# Altium PCB pcb.PcbDoc
Units mil, origin at the board's own origin, x right, y up, seen from the top; angles counter-clockwise.
Board outline 2605 x 2785 mil, 2 copper layers (Top Layer, Bottom Layer); 17 components, 12 nets, 80 pads, 2 vias.
Unrouted connection lines stored in the file: 1.
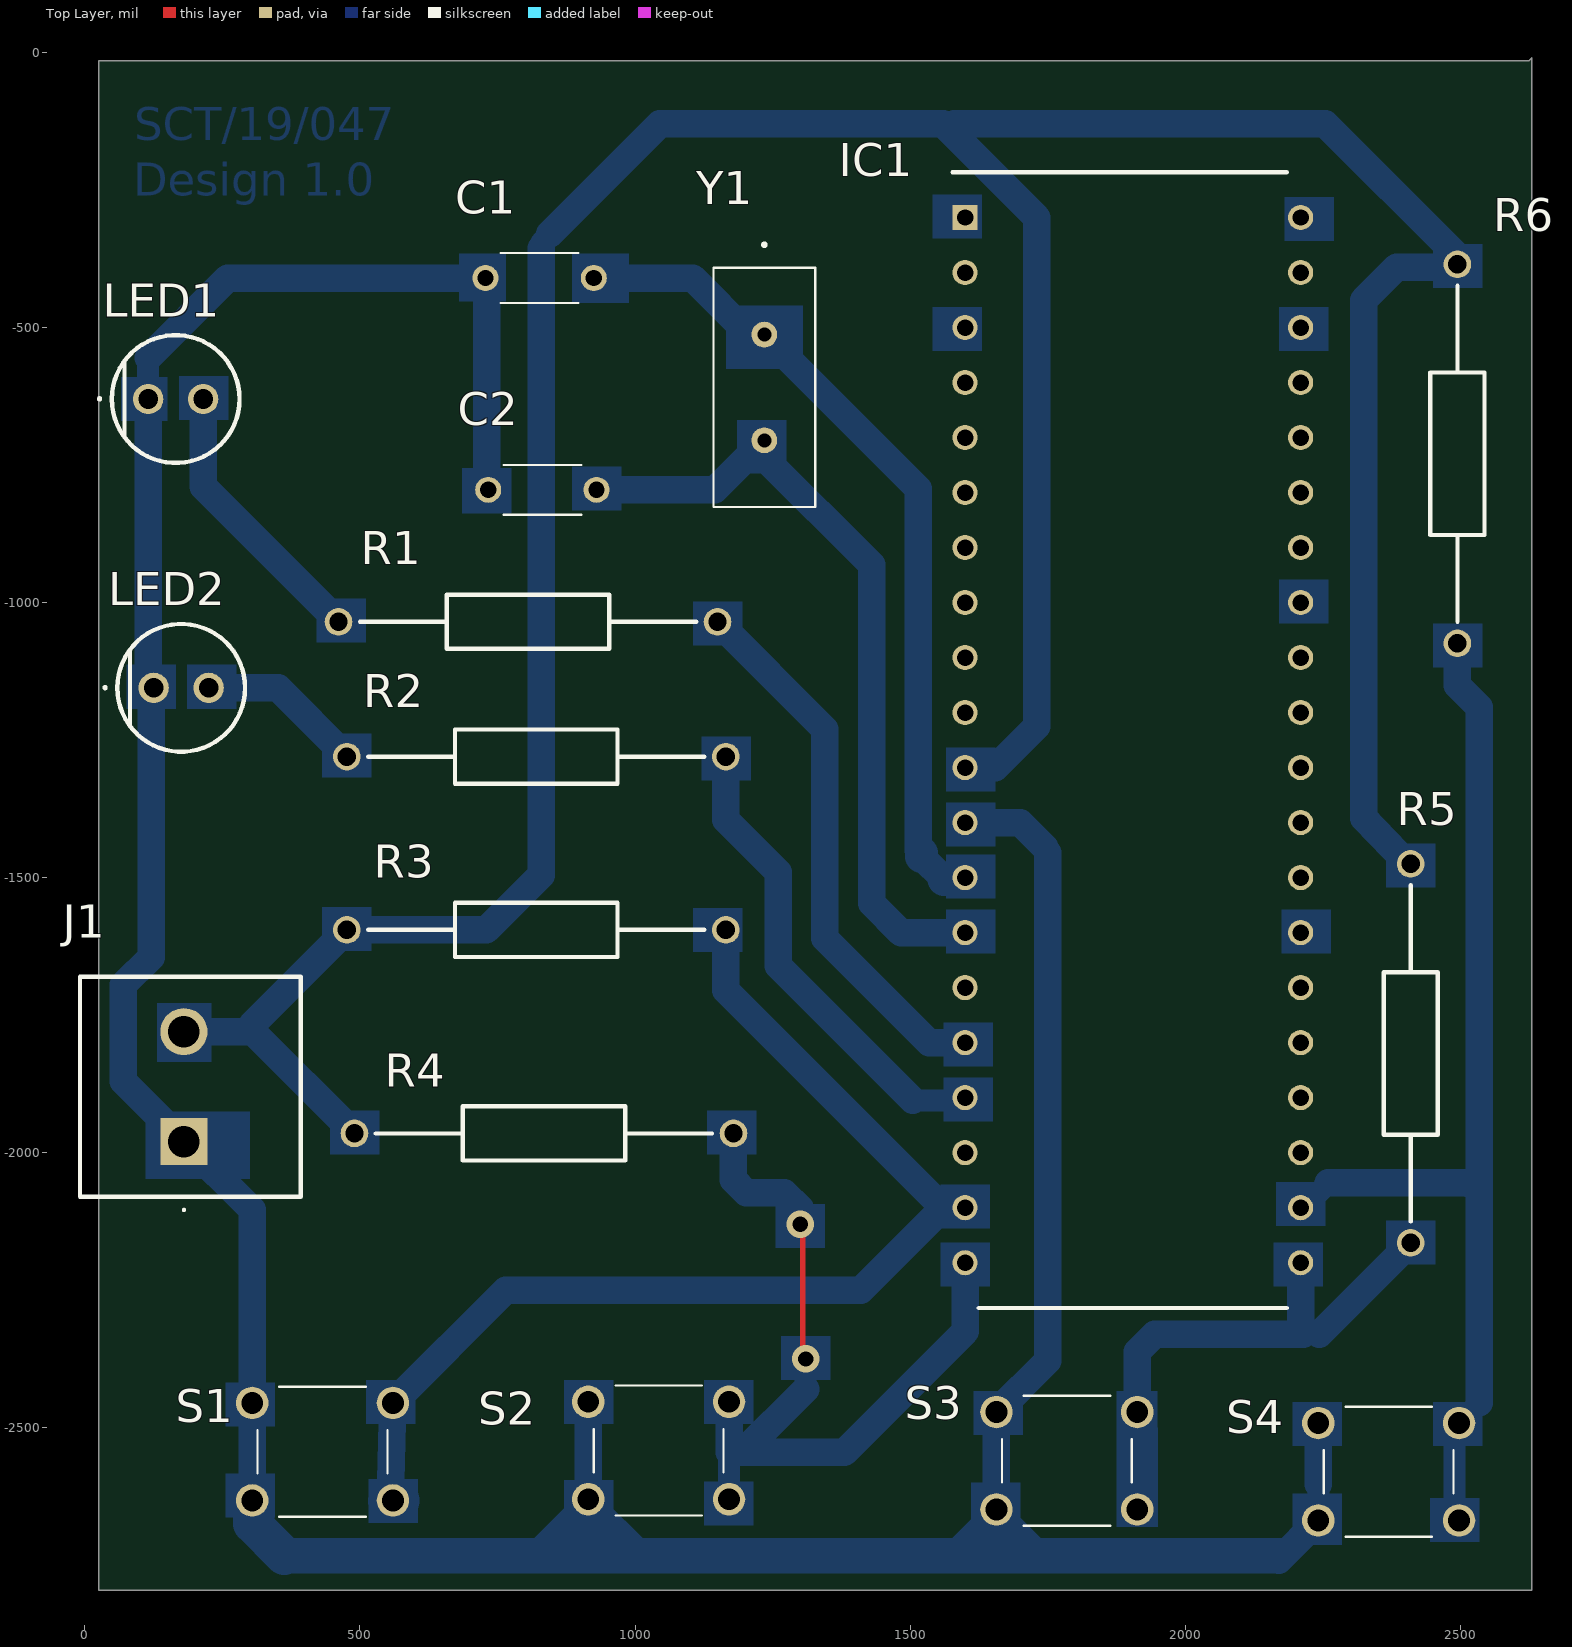
[diagram p0: Top Layer view]
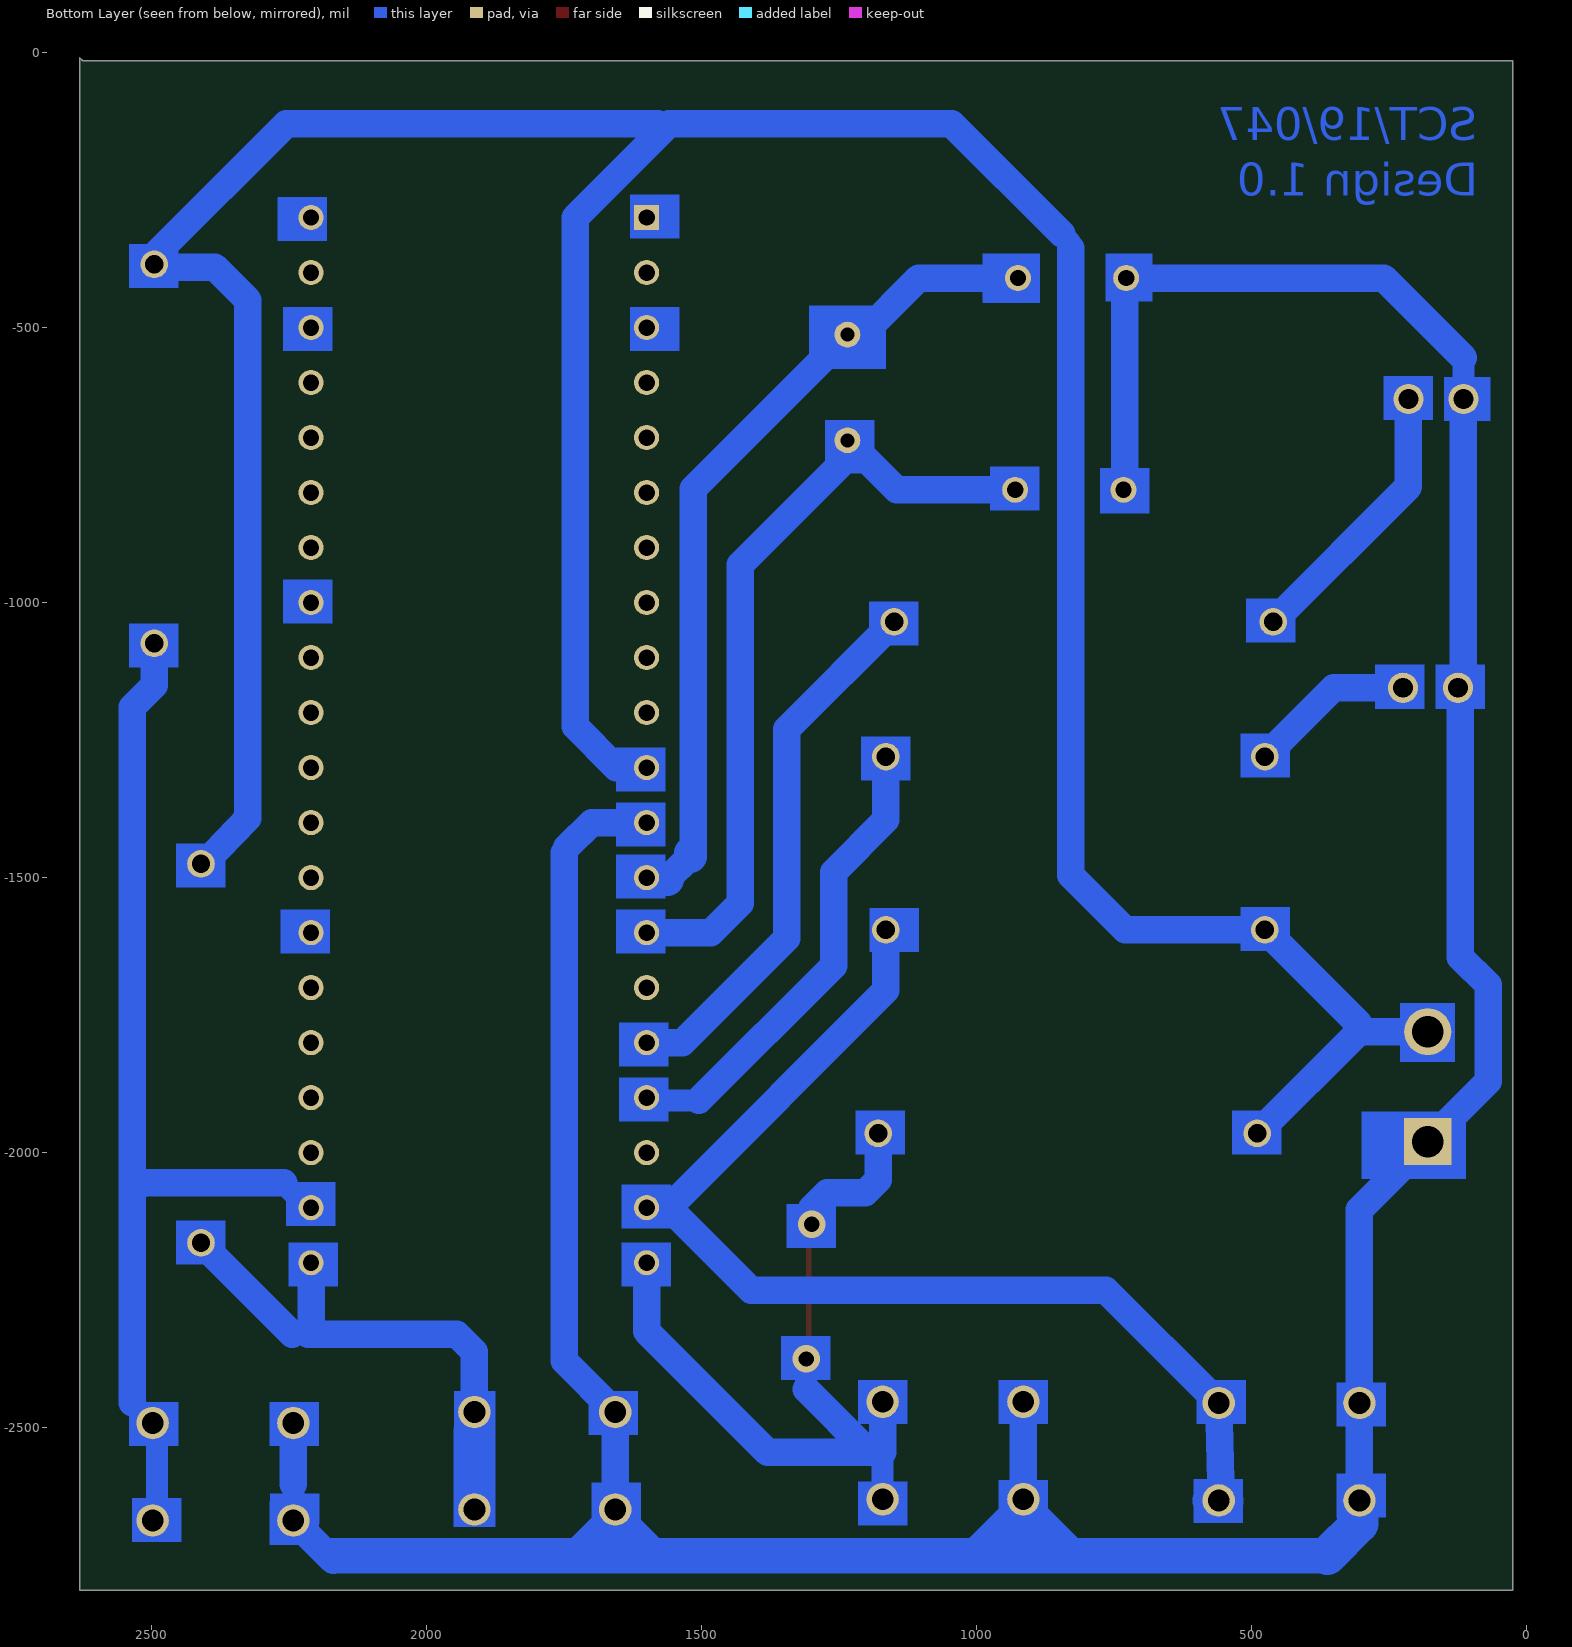
[diagram p1: Bottom Layer view, seen from below]
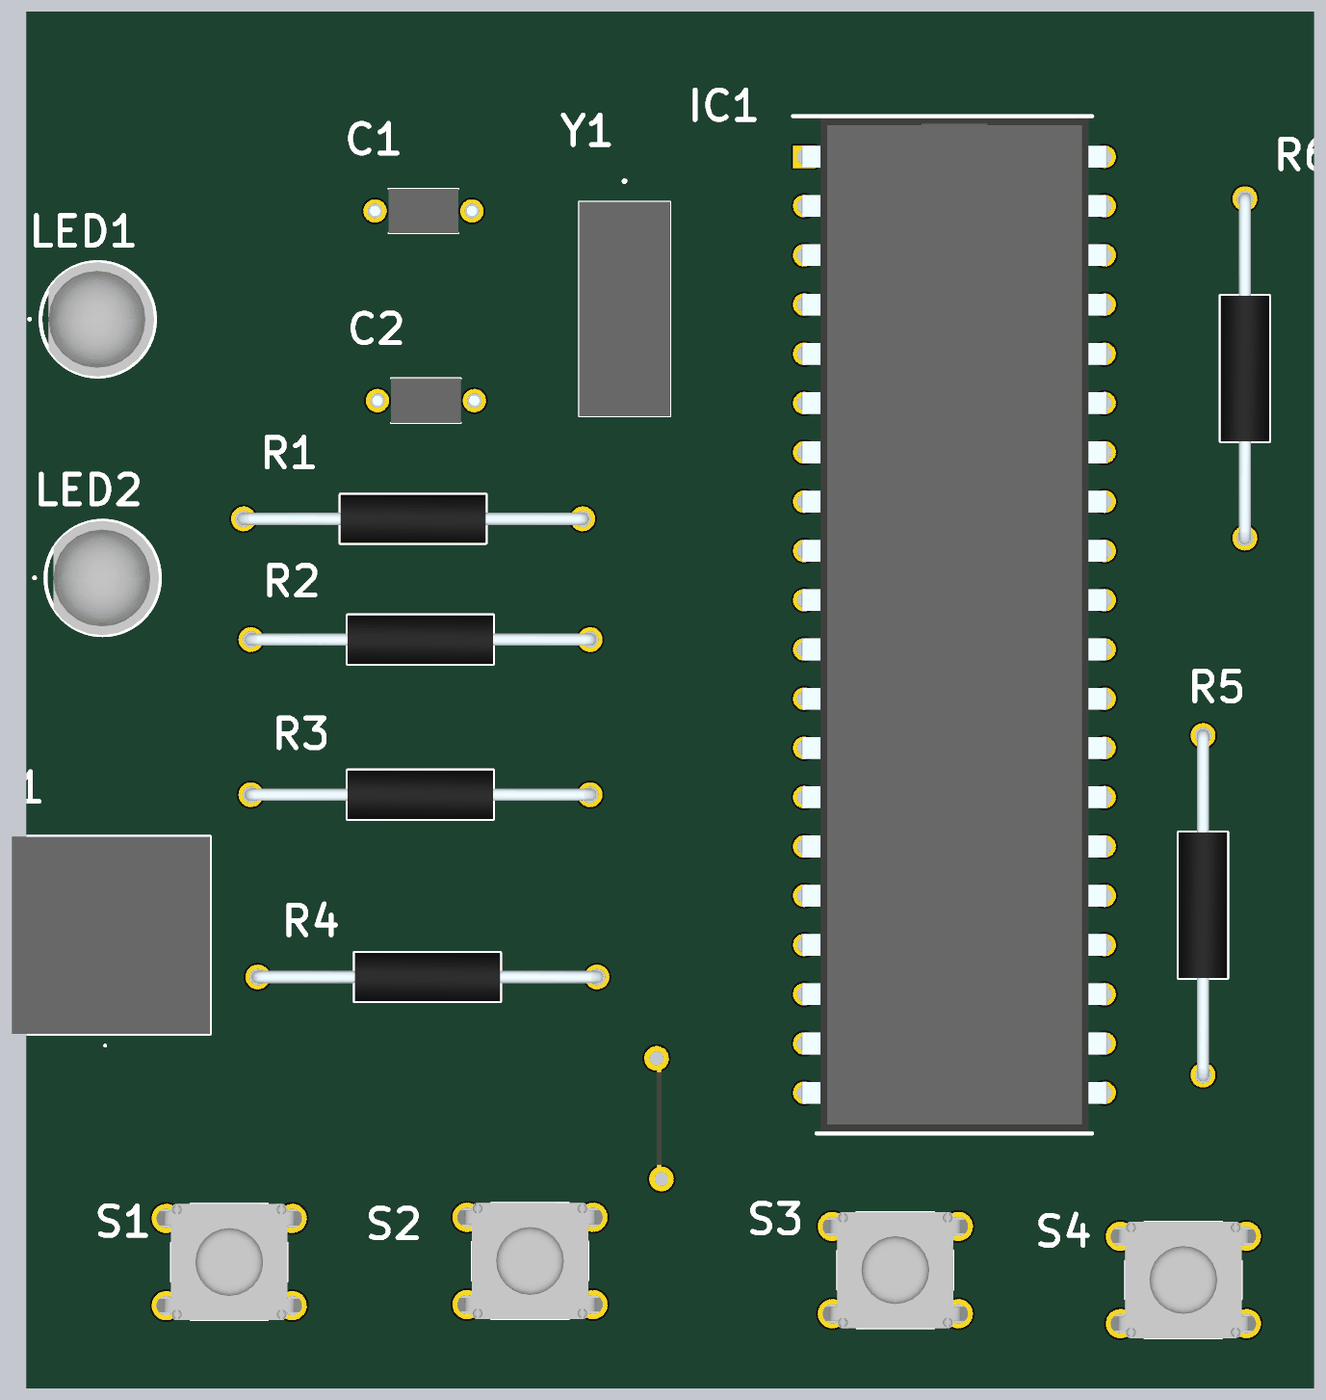
[diagram p2: 3D render of the assembled board from above, using the file's embedded part models]

## Layer stack, top to bottom
Top Solder: solder mask 0.4, Solder Resist, Dk 3.5
Top Layer: signal copper 1.4
Dielectric 1: dielectric 12.6, FR-4, Dk 4.8
Bottom Layer: signal copper 1.4
Bottom Solder: solder mask 0.4, Solder Resist, Dk 3.5

## Board outline
25,-2795 2630,-2795 2630,-10 2625,-15 25,-15

## Design rules (kind name [scope] priority, off if disabled: settings)
Clearance [All] p1: gap=10 ignorepadtopadclearanceinfootprint=FALSE except(0: Arc-Hole Track-Hole SMDPad-Hole THPad-Hole Via-Hole Fill-Hole Poly-Hole Region-Hole Text-Hole)
PolygonConnect [All] p1: connectstyle=Relief reliefconductorwidth=10 reliefentries=4 polygonreliefangle="90 Angle" airgapwidth=10
RoutingLayers [All] p1: top layer_v5=FALSE bottom layer_v5=TRUE
RoutingVias [All] p1: holewidth=28 width=50 viastyle="Through Hole" minholewidth=28 minwidth=50 maxholewidth=28 maxwidth=50
SolderMaskExpansion [All] p1: expansion=4 istentingtop=FALSE
Width Width_1 [All] p1: maxlimit=10 minlimit=10 preferedwidth=10
Width [All] p2: maxlimit=10 minlimit=10 preferedwidth=10
29 further rules are at their usual default settings.

## Classes and differential pairs
component class pic: C1 C2 IC1 LED1 LED2 R1 R3 R4 R5 R6 S2 S3 S4 Y1

## Components (designator, comment, footprint, x,y, rotation, side; value= is the part's Value field where it differs from the comment)
C1 "K220J10C0GF5UH5" K220J10C0GF5UH5 925,-410 r180 top
C2 "K220J10C0GF5UH5" K220J10C0GF5UH5 733.15,-795 r0 top
IC1 "PIC16F877A-I_P" DIP1550W56P254L5219H483Q40N 1905,-1250 r0 top
J1 "MC000048" MC000048 180,-1980 r90 top
LED1 "SSL-LX5093TC" SSL-LX5093SGC/B 165,-630 r180 top
LED2 "SSL-LX5093TC" SSL-LX5093SGC/B 175,-1155 r180 top
R1 "SFR25H0001002FR500" RESAD1750W63L750D250 461.02,-1035 r0 top
R2 "SFR25H0001002FR500" RESAD1750W63L750D250 476.02,-1280 r0 top
R3 "SFR25H0001002FR500" RESAD1750W63L750D250 1165,-1595 r180 top
R4 "SFR25H0001002FR500" RESAD1750W63L750D250 1178.98,-1965 r180 top
R5 "SFR25H0001002FR500" RESAD1750W63L750D250 2410,-2163.98 r90 top
R6 "SFR25H0001002FR500" RESAD1750W63L750D250 2495,-1073.98 r90 top
S1 "TL1105CF160Q" TL1105CF160Q 432.05,-2543.58 r0 top
S2 "TL1105CF160Q" TL1105CF160Q 1042.95,-2541.42 r0 top
S3 "TL1105CF160Q" TL1105CF160Q 1785,-2560 r0 top
S4 "TL1105CF160Q" TL1105CF160Q 2370,-2580 r0 top
Y1 "LFXTAL057135Bulk" LFXTAL057135Bulk 1235,-512.87 r270 top

## Footprints (in the part's own frame and the unit in brackets; to place one, negate y for a bottom-side part, rotate by r counter-clockwise, add the part's x,y. Pads: shape width x height; smd on the part's side, far side on the other; paste and mask are expansions set on the pad)
DIP1550W56P254L5219H483Q40N [mm]
  rect 1.16x1.16 hole 0.76: 1(-7.748,24.13)
  round 1.16 hole 0.76: 2(-7.748,21.59) 3(-7.748,19.05) 4(-7.748,16.51) 5(-7.748,13.97) 6(-7.748,11.43) 7(-7.748,8.89) 8(-7.748,6.35) 9(-7.748,3.81) 10(-7.748,1.27) 11(-7.748,-1.27) 12(-7.748,-3.81) 13(-7.748,-6.35) 14(-7.748,-8.89) 15(-7.748,-11.43) 16(-7.748,-13.97) 17(-7.748,-16.51) 18(-7.748,-19.05) 19(-7.748,-21.59) 20(-7.748,-24.13) 21(7.748,-24.13) 22(7.748,-21.59) 23(7.748,-19.05) 24(7.748,-16.51) 25(7.748,-13.97) 26(7.748,-11.43) 27(7.748,-8.89) 28(7.748,-6.35) 29(7.748,-3.81) 30(7.748,-1.27) 31(7.748,1.27) 32(7.748,3.81) 33(7.748,6.35) 34(7.748,8.89) 35(7.748,11.43) 36(7.748,13.97) 37(7.748,16.51) 38(7.748,19.05) 39(7.748,21.59) 40(7.748,24.13)
  silkscreen extent -8.33,-26.22 7.11,26.22, body extent -7.89,-26.1 7.89,26.1, height 4.83
K220J10C0GF5UH5 [mm]
  round 1.2 hole 0.75: 1(0,0) 2(5,0)
  silkscreen extent 0.7,-1.15 4.3,1.15, body extent -0.28,-1.15 5.28,1.15, height 6.3
LFXTAL057135Bulk [mm]
  round 1.192 hole 0.65: 1(0,0) 2(4.88,0)
  silkscreen extent -4.2,-2.35 7.96,2.35, body extent -3.09,-2.35 7.97,2.35, height 4.2
MC000048 [mm]
  rect 2.175x2.175 hole 1.45: 1(0,0)
  round 2.175 hole 1.45: 2(5.08,0)
  silkscreen extent -3.2,-5.4 7.62,4.8, body extent -2.54,-5.4 7.62,4.8, height 14.4
RESAD1750W63L750D250 [mm]
  round 1.275 hole 0.85: 1(0,0) 2(17.5,0)
  silkscreen extent 0.99,-1.25 16.51,1.25, body extent -0.32,-1.24 17.82,1.24, height 2.5
SSL-LX5093SGC/B [mm]
  round 1.4 hole 0.91: 1(1.27,0) 2(-1.27,0)
  silkscreen extent -2.95,-2.95 3.54,2.95, body extent -2.91,-2.94 2.54,2.94, height 9.57
TL1105CF160Q [mm]
  round 1.5 hole 1: 1(-3.25,-2.25) 2(3.25,-2.25) 3(3.25,2.25) 4(-3.25,2.25)
  silkscreen extent -3,-3 3,3, body extent -3.95,-3 3.95,3, height 5.11

## Part data
C1 C2: "Capacitor", Manufacturer_Name=Vishay, Mouser Part Number=594-K220J10C0GF5UH5, Arrow Part Number=K220J10C0GF5UH5, Arrow Price/Stock=https://www.arrow.com/en/products/k220j10c0gf5uh5/vishay, Datasheet Link=https://componentsearchengine.com/Datasheets/1/K220J10C0GF5UH5.pdf, Height=6.2mm, Manufacturer_Part_Number=K220J10C0GF5UH5, Mouser Price/Stock=https://www.mouser.co.uk/ProductDetail/Vishay-BC-Components/K220J10C0GF5UH5?qs=urQb6HxmPnJQavwMwFUEEw%3D%3D
IC1: "Integrated Circuit", Arrow Part Number=PIC16F877A-I/P, Manufacturer_Name=Microchip, Mouser Part Number=579-PIC16F877A-I/P, Arrow Price/Stock=https://www.arrow.com/en/products/pic16f877a-ip/microchip-technology?region=nac, Datasheet Link=http://componentsearchengine.com/Datasheets/1/PIC16F877A-I_P.pdf, Height=4.83mm, Manufacturer_Part_Number=PIC16F877A-I/P, Mouser Price/Stock=https://www.mouser.co.uk/ProductDetail/Microchip-Technology-Atmel/PIC16F877A-I-P?qs=Vn0zuzr35GH%252Bfm6E5Siyuw%3D%3D
J1: "Connector", Manufacturer_Name=MULTICOMP, Datasheet Link=http://www.farnell.com/datasheets/3186341.pdf, Height=14.3mm, Manufacturer_Part_Number=MC000048
LED1 LED2: "LED", Manufacturer_Name=Lumex, Mouser Part Number=696-SSL-LX5093TC, Arrow Part Number=SSL-LX5093TC, Arrow Price/Stock=https://www.arrow.com/en/products/ssl-lx5093tc/lumex?region=nac, Datasheet Link=https://datasheet.datasheetarchive.com/originals/distributors/Datasheets-DGA13/1155111.pdf, Manufacturer_Part_Number=SSL-LX5093TC, Mouser Price/Stock=https://www.mouser.co.uk/ProductDetail/Lumex/SSL-LX5093TC?qs=94qWIstW55WGdi06hcoEWQ%3D%3D
R1 R2 R3 R4 R5 R6: "Resistor", Manufacturer_Name=Vishay, Mouser Part Number=594-5053HD10K00F, Arrow Part Number=SFR25H0001002FR500, Arrow Price/Stock=https://www.arrow.com/en/products/sfr25h0001002fr500/vishay?region=nac, Datasheet Link=https://www.arrow.com/en/products/sfr25h0001002fr500/vishay, Manufacturer_Part_Number=SFR25H0001002FR500, Mouser Price/Stock=https://www.mouser.co.uk/ProductDetail/Vishay-BC-Components/SFR25H0001002FR500?qs=LCMWAU1DZcweHnnyAMZ4Zg%3D%3D
S1 S2 S3 S4: "Switch", Manufacturer_Name=E-Switch, Mouser Part Number=612-TL1105C, Datasheet Link=https://componentsearchengine.com/Datasheets/1/TL1105CF160Q.pdf, Height=8mm, Manufacturer_Part_Number=TL1105CF160Q, Mouser Price/Stock=https://www.mouser.co.uk/ProductDetail/E-Switch/TL1105CF160Q?qs=YXf4ACKMM4yAAz%252BbnhourA%3D%3D
Y1: "Crystal or Oscillator", Manufacturer_Name=IQD, Mouser Part Number=449-LFXTAL057135BULK, Datasheet Link=https://componentsearchengine.com/Datasheets/1/LFXTAL057135Bulk.pdf, Height=4.1mm, Manufacturer_Part_Number=LFXTAL057135Bulk, Mouser Price/Stock=https://www.mouser.co.uk/ProductDetail/IQD/LFXTAL057135Bulk?qs=e4%2FAndAAwgIkCKEhU7u90A%3D%3D

## Via types
v1: diameter 50, hole 28, Top Layer to Bottom Layer, 2 vias

## Nets (pads, with @x,y where several pads share a name; then routed paths per layer and width w, separated by ;. In a path a pad name is that pad's centre, name@x,y a point inside that pad or via, vN(x,y) a via of type N, cw(c..) or ccw(c..) an arc to the next point about the centre after c; other vN are vias at no path point)
GND: C1.2 C2.1 IC1.12 J1.1 LED1.1 LED2.1 S1.1 S1.4 S2.1 S2.4 S3.1 S3.4 S4.1 S4.4 | length 7619.1
  Bottom Layer w10: LED2.1@115,-1160 LED2.1@115,-1145 ; LED2.1@120,-1160 LED2.1@125,-1160 ; C2.1@730.65,-792.5 C2.1 ; 1750,-1455 1760,-1465
  Bottom Layer w40: LED2.1@115,-1140.91 122.11,-1148.02 LED2.1@120.06,-1150.06 ; LED1.1 115,-555 ; LED2.1@120.06,-1159.94 122.11,-1161.98 122.11,-1168.58 LED2.1@120.56,-1170.13 ; 362.5,-2732.5 1562.5,-2732.5 1570.63,-2740.63 2170,-2740.63 ; 815,-2730 S2.1 1020,-2735 ; 1570.63,-2735 S3.1 1753.47,-2745 ; S4.1 2242.05,-2602.5
  Bottom Layer w50: LED2.1@115,-1140.91 LED1.1 ; 115,-555 260,-410 C1.2 ; LED2.1@120.56,-1170.13 120.56,-1644.44 70,-1695 70,-1870 J1.1 304.1,-2104.1 S1.4 S1.1 ; C2.1@730.65,-792.5 C1.2@730.65,-410.65 ; S2.1 S2.4 ; IC1.12 1700,-1400 1745,-1445 ; S3.1 S3.4 1750,-2378.47 1750,-1455 ; 2170,-2740.63 S4.1 ; 2242.05,-2602.5 S4.4
  Bottom Layer w70: S1.1 304.1,-2674.1 362.5,-2732.5
NetC1_1: C1.1 IC1.13 Y1.1 | length 1440.6
  Bottom Layer w50: C1.1@933.81,-410 1105,-410 1207.87,-512.87 ; Y1.1 1515,-792.87 1515,-1450 ; 1520.58,-1461.64 1562.11,-1503.17
  Bottom Layer w60: 1520.58,-1461.64 1520.58,-1455.58 ; 1562.11,-1503.17 1568.17,-1503.17
NetC2_2: C2.2 IC1.14 Y1.2 | length 1416.1
  Bottom Layer w40: C2.2@925,-795 C2.2
  Bottom Layer w50: C2.2 1145,-795 Y1.2@1225,-715 ; 1235,-736.43 1430,-931.43 1430,-1546.43 1483.57,-1600 IC1.14
NetIC1_11: IC1.11 J1.2 R3.2 R4.2 R5.2 R6.2 | length 6608.2
  Bottom Layer w10: 839.58,-335.42 845.44,-329.56
  Bottom Layer w40: 305,-1780 305,-1766.02 ; 830,-356.06 830,-345 839.58,-335.42 ; IC1.11 1655,-1300 ; R6.2@2493.05,-368.05 2493.05,-383.05 R6.2
  Bottom Layer w50: J1.2 305,-1780 R4.2 ; 305,-1766.02 R3.2@475,-1596.02 ; R3.2 730,-1595 829.14,-1495.86 829.14,-356.06 ; 845.44,-329.56 1045,-130 1130,-130 ; 1135,-130 1560,-130 1730,-300 1730,-1225 1655,-1300 ; 1580,-130 2255,-130 R6.2@2493.05,-368.05 ; R5.2@2405,-1475 2325,-1391.92 2325,-450 2385,-390 R6.2@2495,-390
NetIC1_16: IC1.16 R1.2 | length 994.1
  Bottom Layer w50: R1.2@1146.67,-1031.67 1345,-1230 1345,-1610 1535,-1800 IC1.16
NetIC1_17: IC1.17 R2.2 | length 862.9
  Bottom Layer w40: 1505,-1905 1593.43,-1905 1598.43,-1900 IC1.17
  Bottom Layer w50: R2.2 1165,-1395 1260,-1490 1260,-1660 1505,-1905
NetIC1_19: IC1.19 R3.1 S1.2 S1.3 | length 2022.5
  Bottom Layer w40: S1.2@554.97,-2633.39 S1.2@555,-2632.16 ; S1.2@555,-2632.02 S1.2@555,-2632.16 ; S1.2@572.84,-2632.16 567.84,-2632.16 S1.2 S1.2@555,-2632.16 ; R3.1 1168.33,-1598.58 R3.1@1172.7,-1603.29
  Bottom Layer w50: S1.2@555,-2632.02 S1.3 765,-2250 1410,-2250 1560,-2100 ; R3.1 1165,-1705 1550,-2090
  Bottom Layer w80: S1.2@554.97,-2633.39 566.61,-2633.39 S1.2@567.84,-2632.16
NetIC1_20: IC1.20 R4.1 S2.2 S2.3 | length 1516.3
  Top Layer w10: v1(1300,-2130) 1305,-2135 1305,-2370 v1(1310,-2375)
  Bottom Layer w40: S2.2 1170.91,-2545 1195,-2545 ; S2.3@1170.91,-2457.83 S2.3@1170.91,-2455 ; v1@1298.09,-2128.09 v1(1300,-2130) ; 1310,-2430 v1(1310,-2375)
  Bottom Layer w50: 1170.91,-2545 S2.3@1170.91,-2457.83 ; R4.1 1178.98,-2049.07 1202.41,-2072.5 1271.57,-2072.5 1300,-2100.93 ; 1310,-2430 1195,-2545 1380,-2545 1599.96,-2325.04 IC1.20
NetIC1_21: IC1.21 R5.1 S3.2 S3.3 | length 984.2
  Bottom Layer w10: 2210.04,-2325.04 2215,-2330
  Bottom Layer w40: S3.2 S3.3 ; 2215,-2330 2243.98,-2330
  Bottom Layer w50: S3.3 1912.95,-2362.05 1945,-2330 2215,-2330 ; 2210.04,-2325.04 IC1.21@2210.04,-2204.96 ; 2243.98,-2330 R5.1@2403.98,-2170
NetIC1_22: IC1.22 R6.1 S4.2 S4.3 | length 1970.2
  Bottom Layer w40: IC1.22@2215,-2100 2260,-2055 ; S4.2@2490,-2660 2490,-2504.53 S4.3@2494.31,-2500.22 ; S4.2@2494.31,-2664.31 2494.31,-2664.94 S4.2 ; S4.3@2497.95,-2496.57 S4.3 2535,-2454.37 ; 2511.57,-2055 2535,-2078.43
  Bottom Layer w50: 2260,-2055 2511.57,-2055 ; R6.1 2495,-1150 2535,-1190 2535,-2078.43 2535,-2454.37
NetLED1_2: LED1.2 R1.1 | length 509
  Bottom Layer w10: LED1.2@215,-635 LED1.2@220,-630
  Bottom Layer w50: LED1.2@215,-635 215,-788.98 R1.1
NetLED2_2: LED2.2 R2.1 | length 302.8
  Bottom Layer w50: LED2.2 351.02,-1155 R2.1
pads on no net: IC1.1 IC1.2 IC1.3 IC1.4 IC1.5 IC1.6 IC1.7 IC1.8 IC1.9 IC1.10 IC1.15 IC1.18 IC1.23 IC1.24 IC1.25 IC1.26 IC1.27 IC1.28 IC1.29 IC1.30 IC1.31 IC1.32 IC1.33 IC1.34 IC1.35 IC1.36 IC1.37 IC1.38 IC1.39 IC1.40

## Other copper
Bottom Layer:
  rectangle net GND: 255.58,-2663 345.58,-2583
  rectangle net GND: 255.58,-2498 345.58,-2418
  rectangle net GND: 685.58,-838 775.58,-755
  rectangle net NetIC1_19: 1555.58,-2138 1645.58,-2058
  rectangle net GND: 160.58,-2048 300,-1925
  rectangle net GND: 360,-2765 2175,-2700
  rectangle net GND: 2195,-2675 2285,-2620
  rectangle: 2175.58,-1638 2265.58,-1558
  rectangle: 2170.58,-1038 2260.58,-958
  rectangle: 2170.58,-543 2260.58,-463
  rectangle: 2180.58,-343 2270.58,-263
  rectangle: 1540.58,-543 1630.58,-463
  rectangle net NetC2_2: 1565.58,-1638 1655.58,-1558
  rectangle net NetC1_1: 1565.58,-1538 1655.58,-1458
  rectangle net GND: 1565.58,-1443 1655.58,-1363
  rectangle net NetIC1_11: 1565.58,-1343 1655.58,-1263
  rectangle: 1540.58,-338 1630.58,-258
  rectangle net NetIC1_16: 1560.58,-1843 1650.58,-1763
  rectangle net NetIC1_17: 1560.58,-1943 1650.58,-1863
  rectangle net NetIC1_11: 445.58,-2003 535.58,-1923
  rectangle net NetIC1_11: 430.58,-1633 520.58,-1553
  rectangle net GND: 870.58,-2493 960.58,-2413
  rectangle net GND: 870.58,-2725 960.58,-2595
  rectangle net NetIC1_19: 515.58,-2673 605.58,-2593
  rectangle net NetIC1_19: 510.58,-2493 600.58,-2413
  rectangle net NetC2_2: 1185.58,-765 1275.58,-668
  rectangle net NetC1_1: 1165,-575 1305,-460
  rectangle net NetIC1_11: 2450.58,-428 2540.58,-348
  rectangle net NetIC1_22: 2450.58,-1118 2540.58,-1038
  rectangle net NetIC1_11: 2365.58,-1518 2455.58,-1438
  rectangle net NetIC1_21: 2160.58,-2243 2250.58,-2163
  rectangle net NetIC1_21: 2365.58,-2203 2455.58,-2123
  rectangle net NetIC1_22: 2165.58,-2133 2255.58,-2053
  rectangle net NetIC1_22: 2450.58,-2533 2540.58,-2453
  rectangle net NetIC1_22: 2445.58,-2708 2535.58,-2628
  rectangle net GND: 2195.58,-2713 2285.58,-2633
  rectangle net GND: 2195.58,-2533 2285.58,-2453
  rectangle net NetIC1_21: 1875,-2680 1950.58,-2500
  rectangle net NetIC1_21: 1875,-2513 1950,-2433
  rectangle net NetIC1_20: 1555.58,-2243 1645.58,-2163
  rectangle net GND: 1610.58,-2705 1700.58,-2600
  rectangle net GND: 1615.58,-2513 1705.58,-2433
  rectangle net NetIC1_20: 1125.58,-2678 1215.58,-2598
  rectangle net NetIC1_20: 1125.58,-2493 1215.58,-2413
  rectangle net NetIC1_20: 1255.58,-2173 1345.58,-2093
  rectangle net NetIC1_20: 1265.58,-2413 1355.58,-2333
  rectangle net NetIC1_20: 1130.58,-2003 1220.58,-1923
  rectangle net NetIC1_19: 1105,-1635 1195,-1555
  rectangle net NetIC1_17: 1120.58,-1323 1210.58,-1243
  rectangle net NetIC1_16: 1105.58,-1078 1195.58,-998
  rectangle net NetLED2_2: 430.58,-1318 520.58,-1238
  rectangle net NetLED1_2: 420.58,-1073 510.58,-993
  rectangle net NetC2_2: 885.58,-833 975.58,-753
  rectangle net NetC1_1: 885,-455 989.42,-365
  rectangle net GND: 680,-453 765.58,-365
  rectangle net GND: 65.58,-670 150,-590
  rectangle net NetLED1_2: 170.58,-668 260.58,-588
  rectangle net NetLED2_2: 185.58,-1193 275.58,-1113
  rectangle net GND: 75.58,-1193 165.58,-1113
  rectangle net NetIC1_11: 130.58,-1835 230,-1728
  rectangle net GND: 110.58,-2048 250,-1925
  rectangle net GND: 270,-2670 345,-2590
  text "SCT/19/047" at 90,-160 h60
  text "Design 1.0" at 88.04,-260 h60

## Silkscreen, mask and mechanical layers (free items; w line width, h text height)
cutout (Mech17):
  the board outline again, w10